# EAGLE board PicoITX4USB  (EAGLE 5.11)
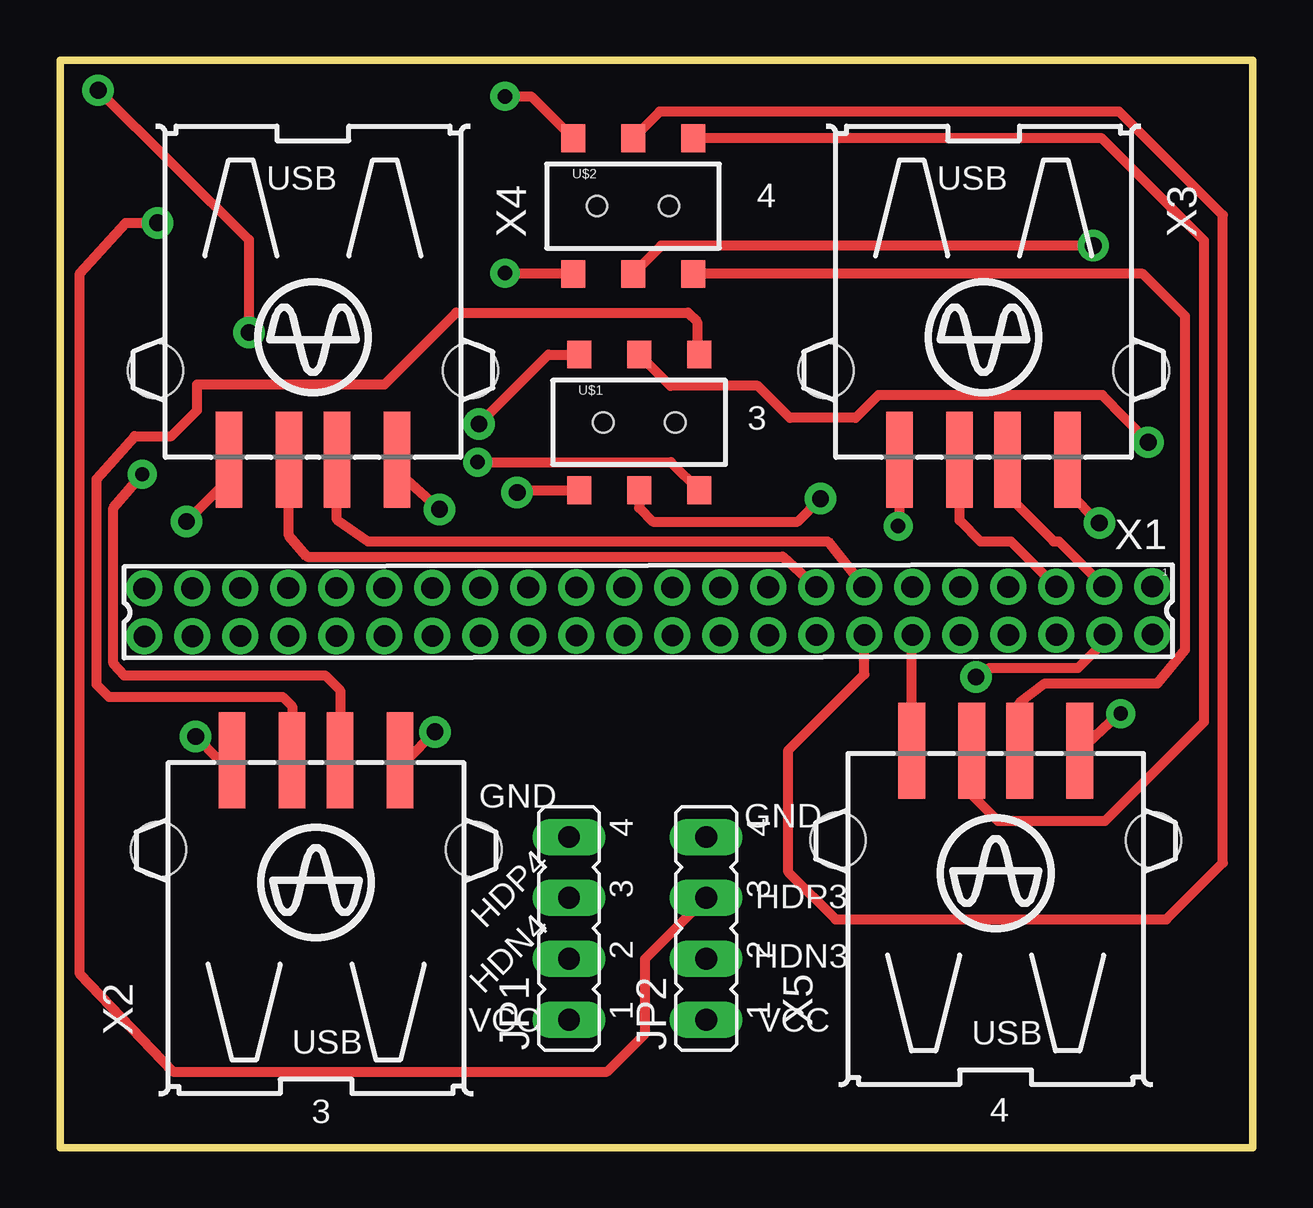
[diagram p0: board, top side]
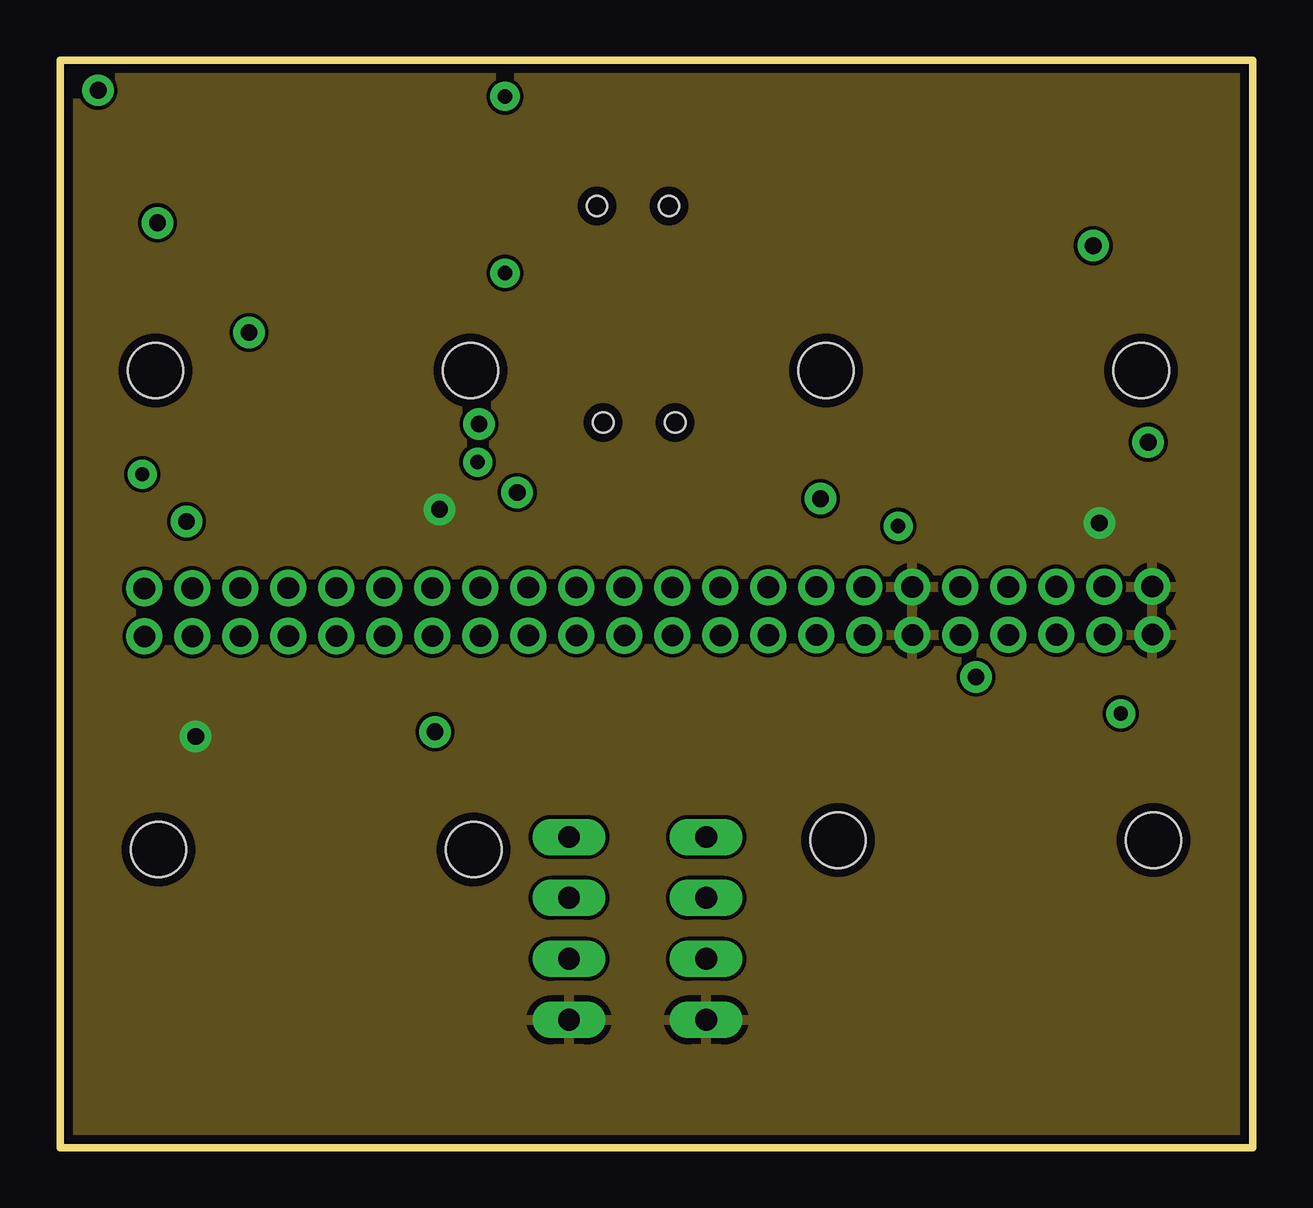
[diagram p1: board, inner layer Route2]
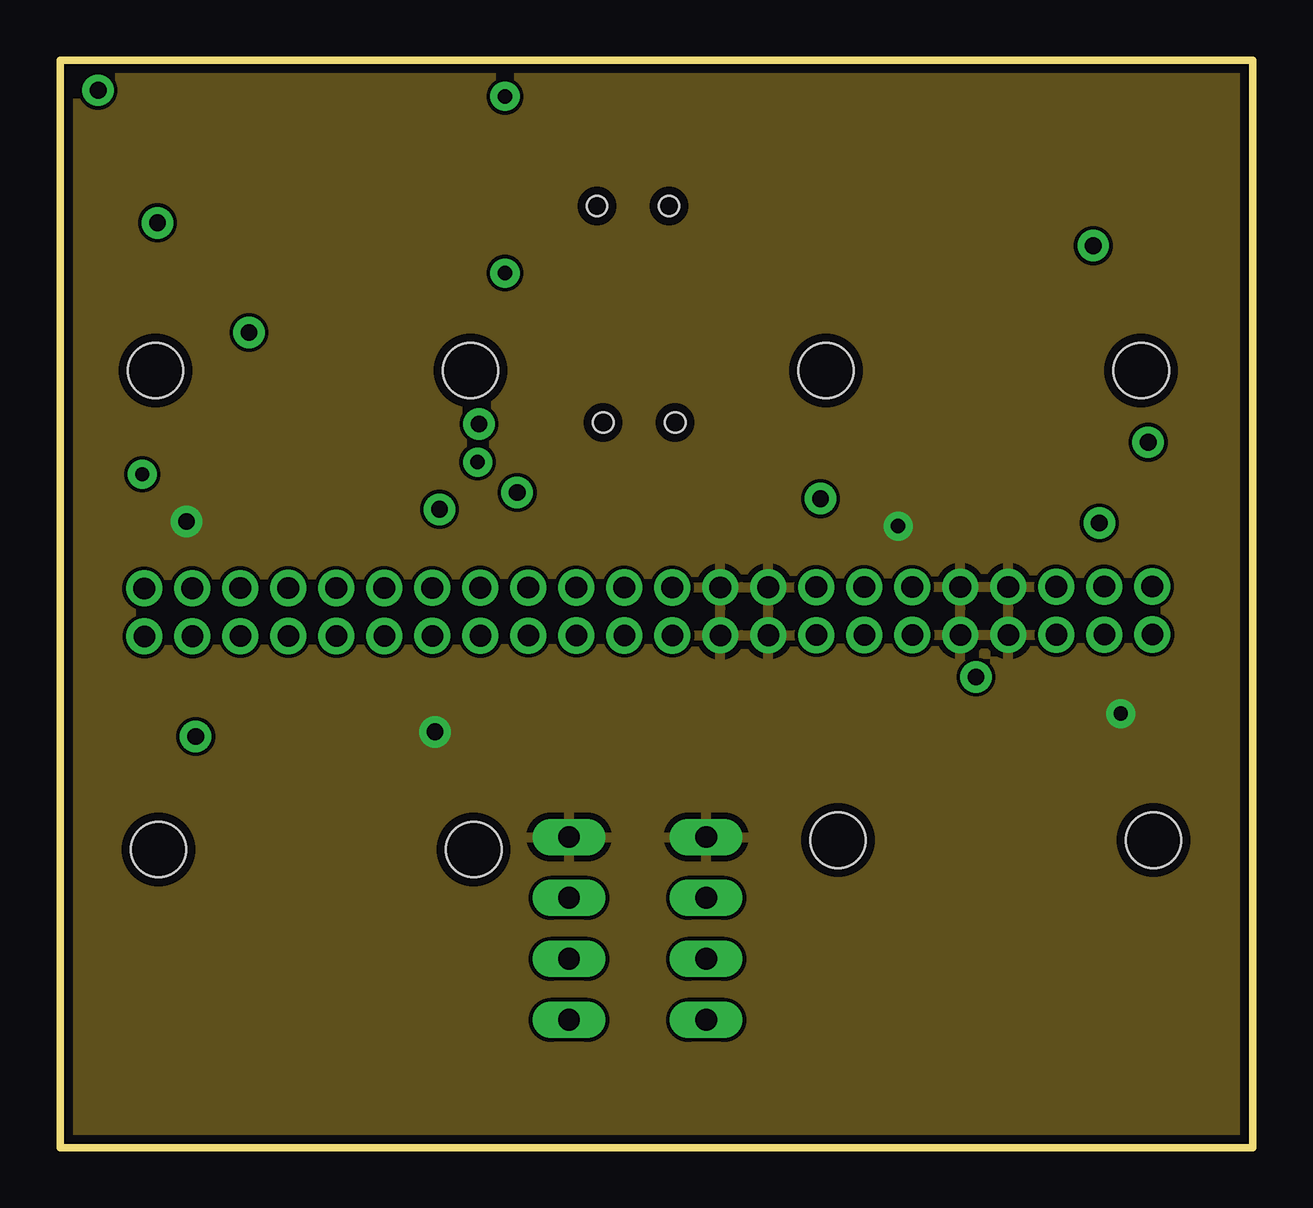
[diagram p2: board, inner layer Route15]
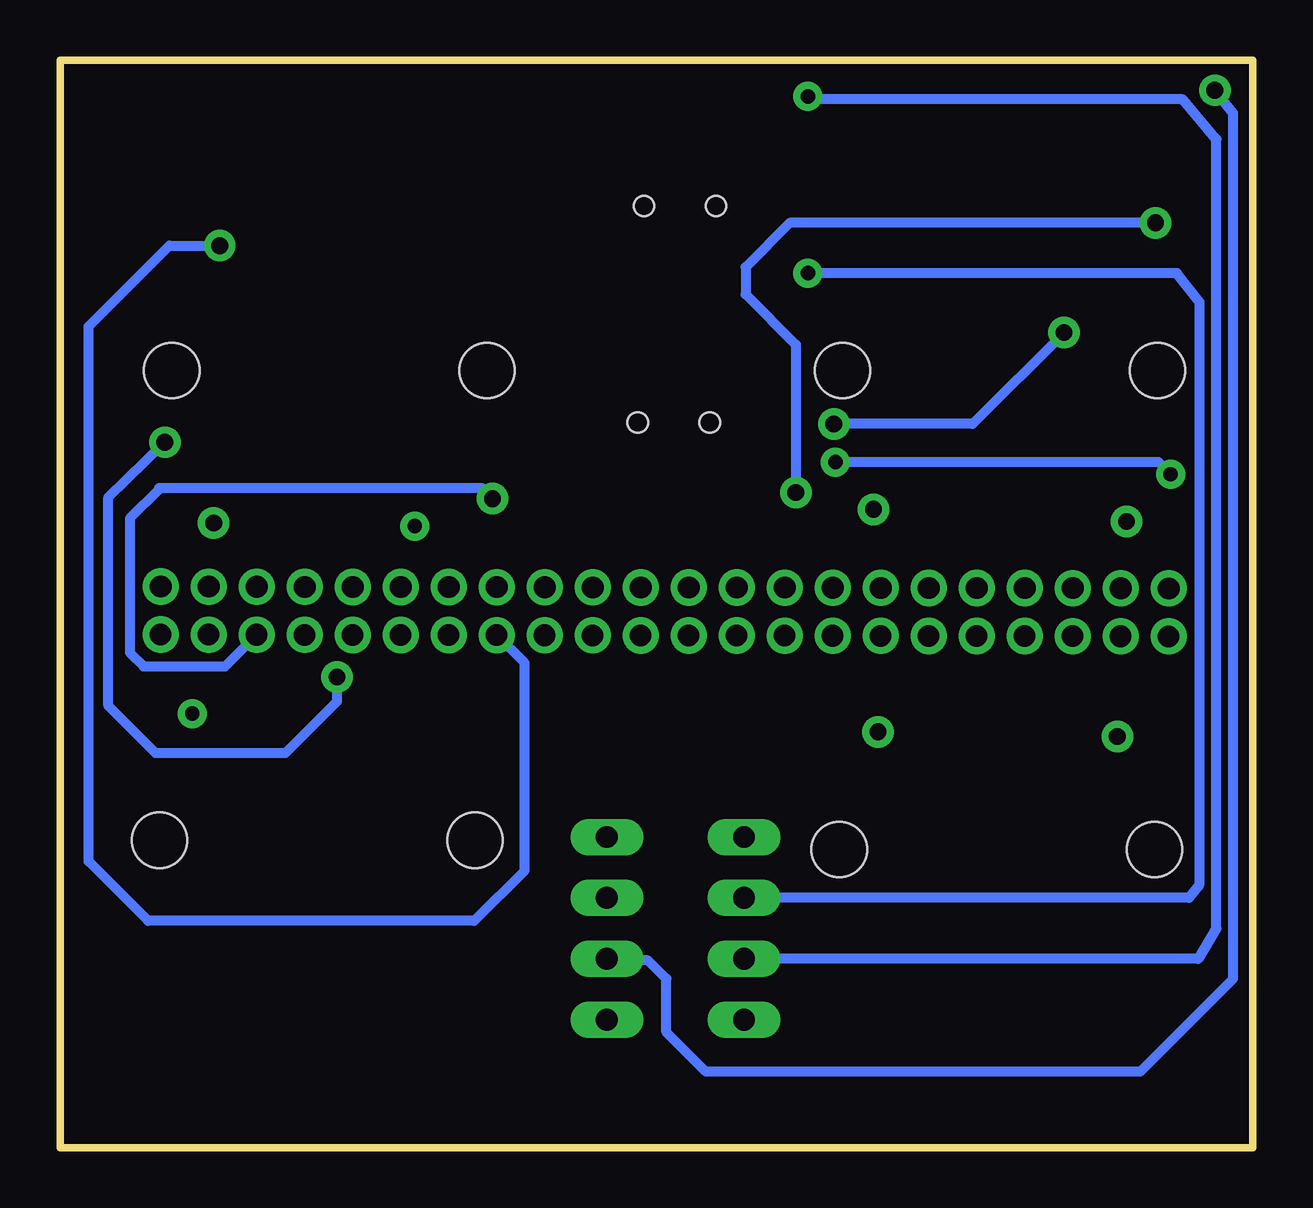
[diagram p3: board, bottom side, seen from below]

Size 49.71 x 45.33 mm. Coordinates in mm from the lower left corner, seen from the top.
Outline: 0,0 49.71,0 49.71,45.33 0,45.33 0,0
Copper layers (1*2*15*16): Top 0.0356mm / dielectric 1.5011mm / Route2 0.0356mm / dielectric 0.1499mm / Route15 0.0356mm / dielectric 0.2007mm / Bottom 0.0356mm
Design rules "Aerial-4Layer *": minimum track width 10mil, minimum drill 15mil, track to track 6mil, track to pad 6mil, pad to pad 6mil, via to via 12mil, smd to smd 6mil, copper to edge 15mil, drill to drill 8mil, minimum pad ring 12mil, minimum via ring 12mil, stop-mask expansion 4mil, vias tented up to drill 0mil, thermal gap 10mil

## Footprints (pad centres in the part's own frame; a part is rotated, then mirrored left to right if it is on the bottom)
JP4 = drill 0.914 long: 1 -3.81,0; 2 -1.27,0; 3 1.27,0; 4 3.81,0
AYZ0202 = smd 1 x 1.15: 1 -2.5,2.825; 2 0,2.825; 3 2.5,2.825; 4 -2.5,-2.825; 5 0,-2.825; 6 2.5,-2.825 | hole 0.85: 1.5,0; -1.5,0
87758-4416 = drill 0.9 pad 1.27 round: 1 -21,-1; 2 -21,1; 3 -19,-1; 4 -19,1; 5 -17,-1; 6 -17,1; 7 -15,-1; 8 -15,1; 9 -13,-1; 10 -13,1; 11 -11,-1; 12 -11,1; 13 -9,-1; 14 -9,1; 15 -7,-1; 16 -7,1; 17 -5,-1; 18 -5,1; 19 -3,-1; 20 -3,1; 21 -1,-1; 22 -1,1; 23 1,-1; 24 1,1; 25 3,-1; 26 3,1; 27 5,-1; 28 5,1; 29 7,-1; 30 7,1; 31 9,-1; 32 9,1; 33 11,-1; 34 11,1; 35 13,-1; 36 13,1; 37 15,-1; 38 15,1; 39 17,-1; 40 17,1; 41 19,-1; 42 19,1; 43 21,-1; 44 21,1
USB-A003 = smd 1.12 x 4: 1 -3.5,14; 2 -1,14; 3 1,14; 4 3.5,14 | hole 2.3: -6.57,10.28; 6.57,10.28

## Placement (x,y rotation side)
JP1  [JP4]  21.21,9.14 90 top
JP2  [JP4]  26.92,9.14 90 top
U$1  AYZ0202  [AYZ0202]  24.13,30.23 0 top
U$2  AYZ0202  [AYZ0202]  23.88,39.24 0 top
X1  87758-4416  [87758-4416]  24.51,22.35 180.1 top
X2  [USB-A003]  10.67,2.16 0 top
X3  [USB-A003]  38.48,42.67 180 top
X4  [USB-A003]  10.54,42.67 180 top
X5  [USB-A003]  38.99,2.54 0 top

## Library data of the parts
JP1 JP2 = jumper
U$1 U$2 = SparkFun
X1 = con-molex; MF: MOLEX; MPN: 87758-4416; OC_FARNELL: unknown; OC_NEWARK: 59J1588
X2-X5 = con-yamaichi; OC_FARNELL: unknown; OC_NEWARK: unknown

## Nets
DN1: X1.3 X3.2
DN2: X1.13 X4.2
DN3: U$1.2 X1.4
DN4: U$2.2 X1.14
DP1: X1.5 X3.3
DP2: X1.15 X4.3
DP3: U$1.5 X1.6
DP4: U$2.5 X1.16
GND: JP1.4 JP2.4 X1.7 X1.8 X1.9 X1.10 X1.17 X1.18 X1.19 X1.20 X2.4 X3.4 X4.4 X5.4
HDN3: JP2.2 U$1.1
HDN4: JP1.2 U$2.1
HDP3: JP2.3 U$1.4
HDP4: JP1.3 U$2.4
UDN3: U$1.3 X2.2
UDN4: U$2.3 X5.2
UDP3: U$1.6 X2.3
UDP4: U$2.6 X5.3
VDD: JP1.1 JP2.1 X1.1 X1.2 X1.11 X1.12 X2.1 X3.1 X4.1 X5.1

## Tracks (layer width: path | path; a pad name or v marks a point on that pad's centre or on a via)
DN1
  Top 0.406: X3.2 39.48,27.19 41.4,25.27 41.62,25.27 X1.3
DN2
  Top 0.406: X4.2 11.54,26.18 12.83,25.27 31.98,25.27 X1.13
DN3  (via drill 0.7)
  Top 0.406: U$1.2 25.43,31.75 29.08,31.75 30.42,30.42 33.15,30.42 34.1,31.37 43.43,31.37 v45.34,29.4 | v38.16,19.62 38.73,20 42.42,20 43.51,21.1 X1.4
  Bottom 0.406: v45.34,29.4 47.69,27.11 47.69,18.41 45.72,16.45 40.32,16.45 38.16,18.61 v38.16,19.62
DN4
  Top 0.406: U$2.2 24.99,43.18 44.13,43.18 48.45,38.86 48.45,11.87 46.1,9.53 32.32,9.53 30.35,11.49 30.35,16.57 33.51,19.73 X1.14
DP1
  Top 0.406: X3.3 37.48,26.15 38.35,25.27 39.62,25.27 X1.5
DP2
  Top 0.406: X4.3 9.54,25.51 10.29,24.64 30.11,24.64 X1.15
DP3  (via drill 0.7)
  Top 0.406: U$1.5 24.13,26.67 24.7,26.1 30.73,26.1 v31.69,27.05
  Bottom 0.406: v31.69,27.05 32.13,27.5 45.59,27.5 45.59,27.43 46.8,26.23 46.8,20.64 46.23,20.07 42.83,20.07 X1.6
DP4  (via drill 0.7)
  Top 0.406: U$2.5 25.05,37.59 v43.05,37.59
  Bottom 0.406: v43.05,37.59 45.15,37.59 48.51,34.23 48.51,11.94 46.04,9.46 32.45,9.46 30.35,11.56 30.35,20.2 X1.16
GND  (via drill 0.6, 0.7)
  Top 0.406: X5.4 44.08,18.03 v44.2,18.1 | X3.4 34.98,25.96 v34.92,25.91 | X2.4 14.44,16.16 v15.62,17.34 | X4.4 7.04,27.87 v5.27,26.1
  Route15 0.406: v15.62,17.34 15.68,17.34 | v5.27,26.1 5.21,26.1
  Bottom 0.406: v34.92,25.91 34.92,25.78
  pour Route15: 0.29,45.01 49.23,45.01 49.23,0.65 0.29,0.65
HDN3  (via drill 0.7)
  Top 0.406: U$1.1 20.35,33.05 v17.46,30.16 | v7.87,33.97 7.87,37.85 v1.59,44.07
  Bottom 0.406: v17.46,30.16 11.68,30.16 v7.87,33.97 | v1.59,44.07 0.83,43.12 0.83,7.05 4.7,3.17 22.8,3.17 24.45,4.83 24.45,7.05 25.21,7.81 26.86,7.81 JP2.2
HDN4  (via drill 0.6)
  Top 0.406: v18.54,43.81 19.63,43.81 U$2.1
  Bottom 0.406: JP1.2 2.29,7.87 1.52,9.14 1.52,42.04 2.92,43.69 18.41,43.69 v18.54,43.81
HDP3  (via drill 0.7)
  Top 0.406: U$1.4 19.15,27.4 v19.05,27.3 | v4.06,38.54 2.73,38.54 0.83,36.45 0.83,7.24 4.7,3.17 22.8,3.17 24.38,4.76 24.38,7.87 JP2.3
  Bottom 0.406: v19.05,27.3 19.05,33.46 21.14,35.56 21.14,36.7 19.3,38.54 v4.06,38.54
HDP4  (via drill 0.6)
  Top 0.406: v18.54,36.45 21.34,36.45 U$2.4
  Bottom 0.406: JP1.3 2.67,10.41 2.22,10.99 2.22,35.24 3.17,36.45 v18.54,36.45
UDN3
  Top 0.406: X2.2 9.67,18.4 9.27,18.8 2.03,18.8 1.52,19.3 1.52,27.88 3.11,29.65 4.64,29.65 5.71,30.73 5.71,31.81 13.53,31.81 16.51,34.8 26.16,34.8 26.54,34.42 26.54,33.14 U$1.3
UDN4
  Top 0.406: U$2.3 43.42,42.07 47.68,37.81 47.68,17.75 43.55,13.63 39.08,13.63 37.99,14.72 X5.2
UDP3  (via drill 0.6)
  Top 0.406: X2.3 11.67,19.07 11.05,19.68 2.67,19.68 2.22,20.19 2.22,26.67 v3.43,28.07 | v17.4,28.57 25.46,28.57 U$1.6
  Bottom 0.406: v3.43,28.07 3.94,28.57 v17.4,28.57
UDP4
  Top 0.406: U$2.6 45.12,36.42 46.88,34.66 46.88,20.75 45.73,19.36 41.03,19.36 39.99,18.57 X5.3
VDD  (via drill 0.7)
  Top 0.406: X2.1 6.64,16.16 v5.65,17.14 | X4.1 14.04,28.19 v15.81,26.61 | X3.1 41.98,27.36 v43.31,26.04 | X5.1 35.49,21.35 X1.12
  Route2 0.406: v5.65,17.14 5.59,17.14 | v15.81,26.61 15.94,26.42 16,26.35 | v43.31,26.04 43.43,25.91
  pour Route2: 0.37,44.91 49.21,44.91 49.21,0.53 0.37,0.53

## Text on the board
tPlace: 4 | 3 | GND | GND | HDP3 | HDP4 | HDN3 | HDN4 | VCC | VCC | 3 | 4